# EAGLE board board (EAGLE 7.7.0)
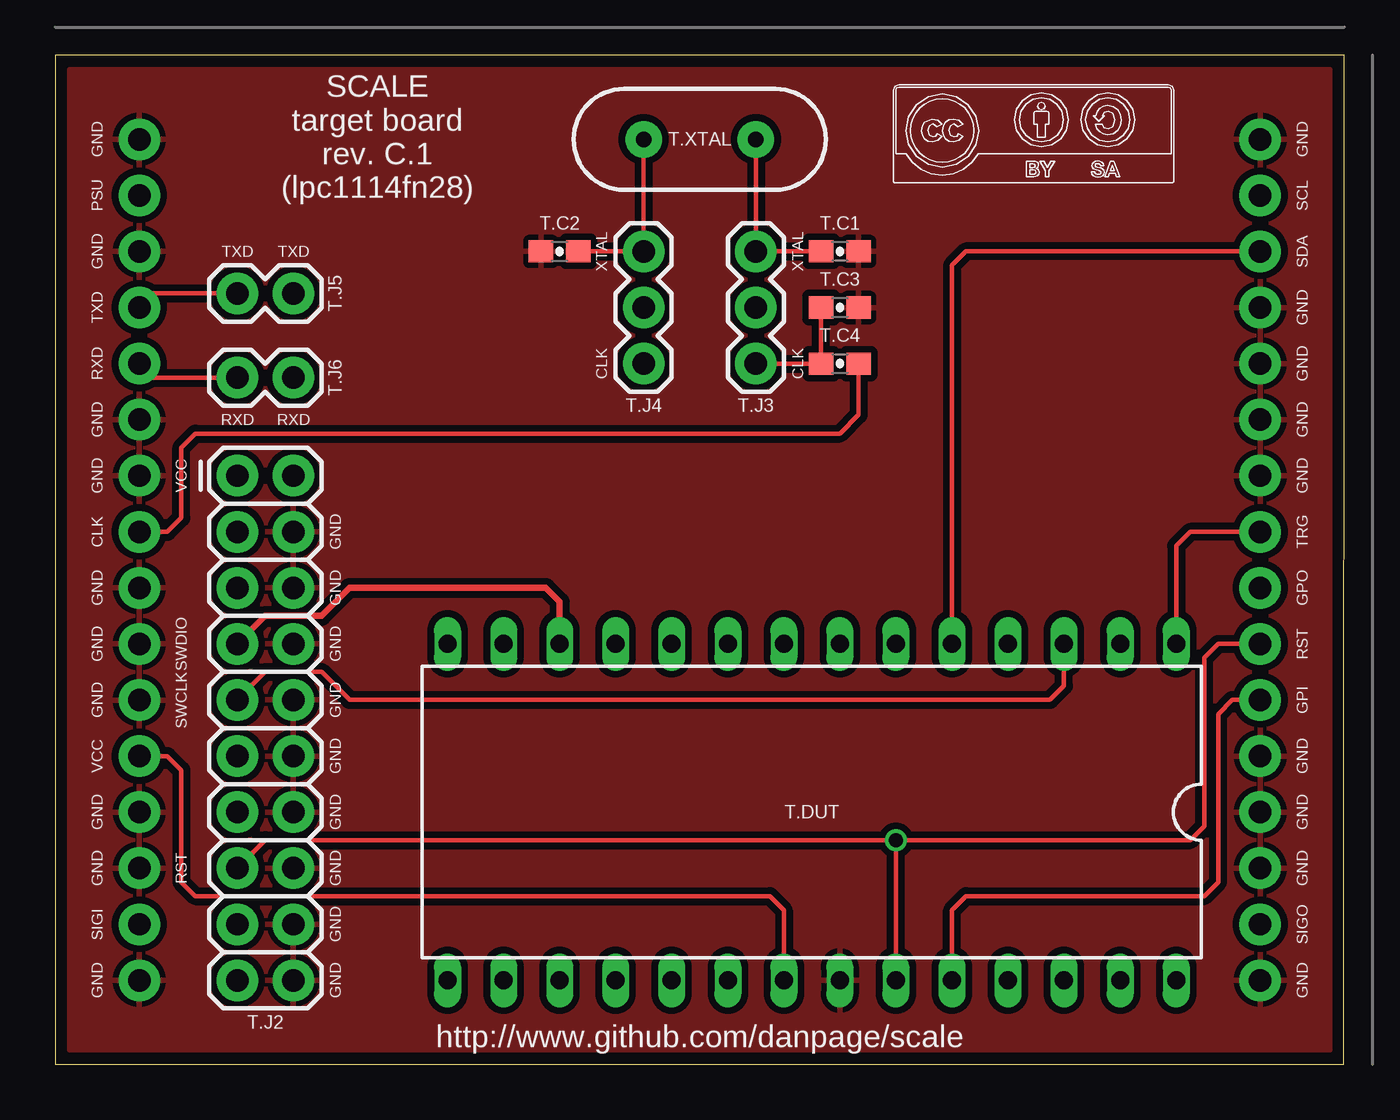
[diagram p0: board, top side]
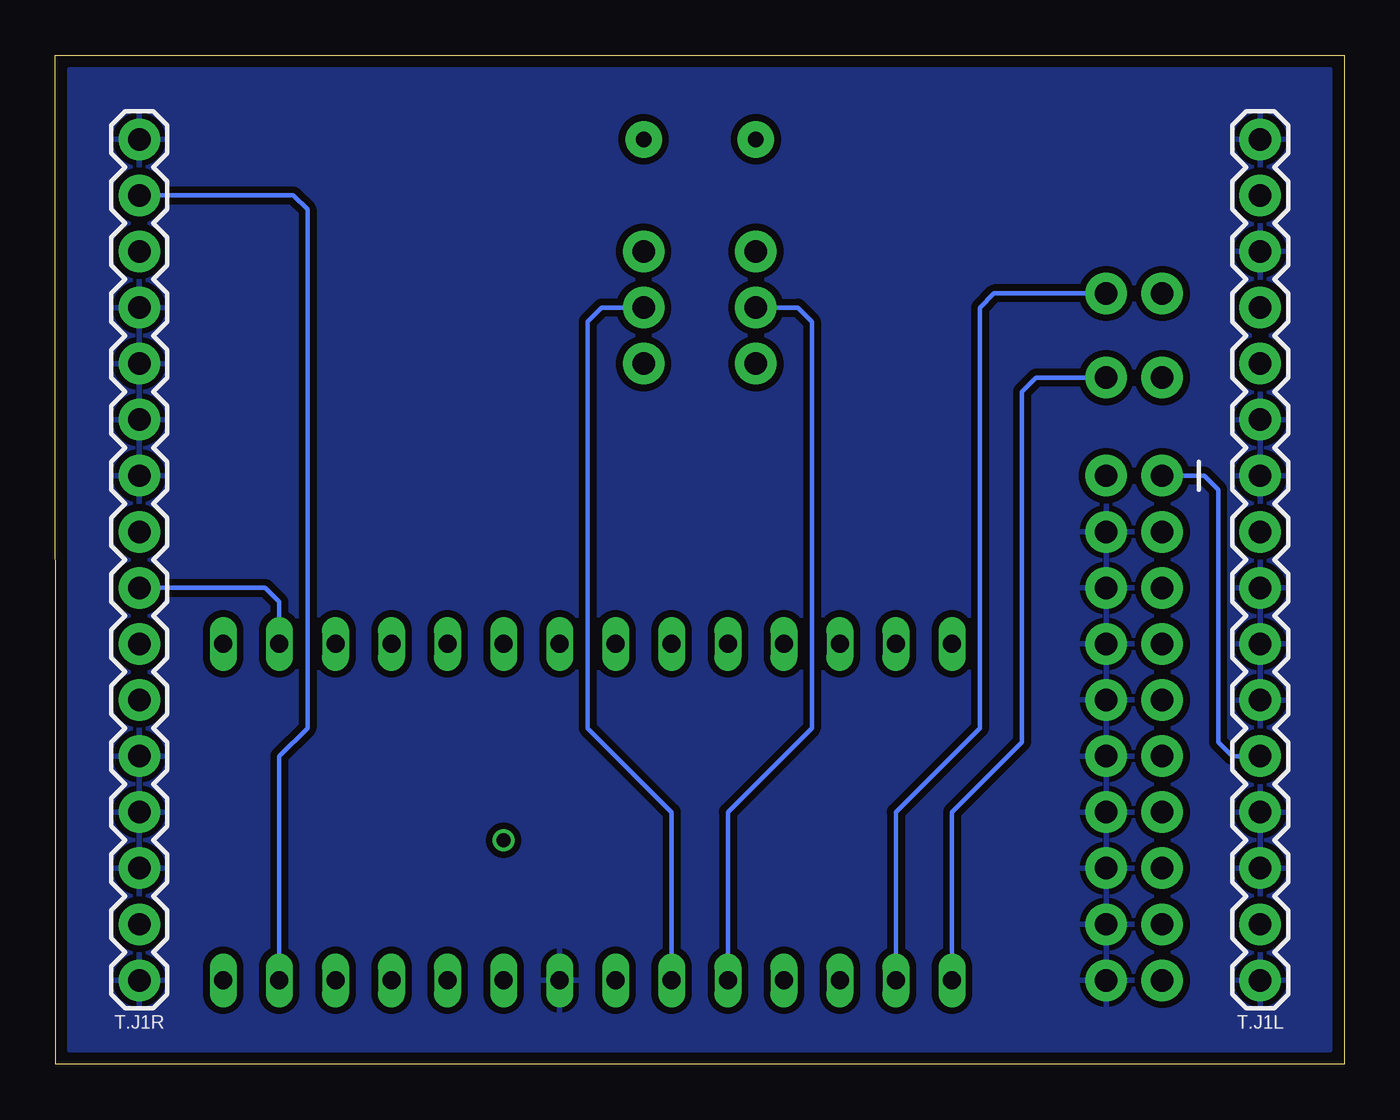
[diagram p1: board, bottom side, seen from below]

Size 58.42 x 45.72 mm. Coordinates in mm from the lower left corner, seen from the top.
Outline: 0,0 58.4,0 58.42,45.72 0,45.72 0,0
Copper layers (1*16): Top 0.0356mm / dielectric 1.5011mm / Bottom 0.0356mm
Design rules "oshpark-2layer": minimum track width 6mil, minimum drill 13mil, track to track 6mil, track to pad 6mil, pad to pad 6mil, via to via 6mil, smd to smd 6mil, copper to edge 15mil, drill to drill 6mil, minimum pad ring 7mil, minimum via ring 7mil, stop-mask expansion 2.5mil, vias tented up to drill 0mil, thermal gap 10mil

## Footprints (pad centres in the part's own frame; a part is rotated, then mirrored left to right if it is on the bottom)
0603-CAP = smd 1.1 x 1: 1 -0.85,0; 2 0.85,0
DIL28-6 = drill 0.813 long: 1 -16.51,-7.62; 2 -13.97,-7.62; 3 -11.43,-7.62; 4 -8.89,-7.62; 5 -6.35,-7.62; 6 -3.81,-7.62; 7 -1.27,-7.62; 8 1.27,-7.62; 9 3.81,-7.62; 10 6.35,-7.62; 11 8.89,-7.62; 12 11.43,-7.62; 13 13.97,-7.62; 14 16.51,-7.62; 15 16.51,7.62; 16 13.97,7.62; 17 11.43,7.62; 18 8.89,7.62; 19 6.35,7.62; 20 3.81,7.62; 21 1.27,7.62; 22 -1.27,7.62; 23 -3.81,7.62; 24 -6.35,7.62; 25 -8.89,7.62; 26 -11.43,7.62; 27 -13.97,7.62; 28 -16.51,7.62
1X16 = drill 1.016 pad 1.88: 1 0,0; 2 2.54,0; 3 5.08,0; 4 7.62,0; 5 10.16,0; 6 12.7,0; 7 15.24,0; 8 17.78,0; 9 20.32,0; 10 22.86,0; 11 25.4,0; 12 27.94,0; 13 30.48,0; 14 33.02,0; 15 35.56,0; 16 38.1,0
2X10 = drill 1.016 pad 1.88: 1 0,0; 2 0,2.54; 3 2.54,0; 4 2.54,2.54; 5 5.08,0; 6 5.08,2.54; 7 7.62,0; 8 7.62,2.54; 9 10.16,0; 10 10.16,2.54; 11 12.7,0; 12 12.7,2.54; 13 15.24,0; 14 15.24,2.54; 15 17.78,0; 16 17.78,2.54; 17 20.32,0; 18 20.32,2.54; 19 22.86,0; 20 22.86,2.54
1X03 = drill 1.016 pad 1.88: 1 0,0; 2 2.54,0; 3 5.08,0
1X02 = drill 1.016 pad 1.88: 1 0,0; 2 2.54,0
HC49US = drill 0.7 pad 1.651: 1 -2.54,0; 2 2.54,0

## Placement (x,y rotation side)
T.C1  0.018 nF = 18 pF  [0603-CAP]  35.56,36.83 180 top
T.C2  0.018 nF = 18 pF  [0603-CAP]  22.86,36.83 0 top
T.C3  0.3 nF = 300 pF  [0603-CAP]  35.56,34.29 180 top
T.C4  0.1 nF = 100 pF  [0603-CAP]  35.56,31.75 0 top
T.DUT  [DIL28-6]  34.29,11.43 180 top
T.J1L  [1X16]  3.81,3.81 90 bottom
T.J1R  [1X16]  54.61,3.81 90 bottom
T.J2  [2X10]  8.26,26.67 270 top
T.J3  [1X03]  31.75,36.83 270 top
T.J4  [1X03]  26.67,36.83 270 top
T.J5  [1X02]  8.26,34.92 0 top
T.J6  [1X02]  8.26,31.11 0 top
T.XTAL  16 Mhz  [HC49US]  29.21,41.91 0 top

## Library data of the parts
T.C1-T.C4 = SparkFun-Capacitors
T.DUT = ic-package
T.J1L T.J1R T.J2-T.J6 = SparkFun-Connectors
T.XTAL = SparkFun-FreqCtrl

## Nets
DUT_CLK: T.C4.2 T.J1L.9
DUT_GPI: T.DUT.24 T.J1R.6
DUT_GPO: T.DUT.2 T.J1R.8
DUT_RST: T.DUT.23 T.J1R.7 T.J2.15
DUT_RXD: T.J1L.12 T.J6.1
DUT_SCL: T.DUT.27 T.J1R.15
DUT_SDA: T.DUT.5 T.J1R.14
DUT_SIGI: T.J1L.2
DUT_SIGO: T.J1R.2
DUT_SWCLK: T.DUT.3 T.J2.9
DUT_SWDIO: T.DUT.12 T.J2.7
DUT_SWO: T.J2.13
DUT_TRG: T.DUT.1 T.J1R.9
DUT_TXD: T.J1L.13 T.J5.1
DUT_VCC: T.DUT.21 T.J1L.5 T.J2.1
DUT_XTAL1: T.DUT.20 T.J3.2
DUT_XTAL2: T.DUT.19 T.J4.2
GND: T.C1.1 T.C2.1 T.C3.1 T.DUT.22 T.J1L.1 T.J1L.3 T.J1L.4 T.J1L.6 T.J1L.7 T.J1L.8 T.J1L.10 T.J1L.11 T.J1L.14 T.J1L.16 T.J1R.1 T.J1R.3 T.J1R.4 T.J1R.5 T.J1R.10 T.J1R.11 T.J1R.12 T.J1R.13 T.J1R.16 T.J2.4 T.J2.6 T.J2.8 T.J2.10 T.J2.12 T.J2.14 T.J2.16 T.J2.18 T.J2.20
N$1: T.C1.2 T.J3.1 T.XTAL.2
N$2: T.C2.2 T.J4.1 T.XTAL.1
N$20: T.C3.2 T.C4.1 T.J3.3
N$27: T.DUT.16 T.J5.2
N$28: T.DUT.15 T.J6.2
PSU: T.J1L.15

## Tracks (layer width: path | path; a pad name or v marks a point on that pad's centre or on a via)
DUT_CLK
  Top 0.203: T.J1L.9 5.08,24.13 5.71,24.77 5.71,27.94 6.35,28.57 35.56,28.57 36.41,29.43 T.C4.2
DUT_GPI
  Top 0.203: T.DUT.24 40.64,6.99 41.27,7.62 52.07,7.62 52.7,8.26 52.7,15.88 53.34,16.51 T.J1R.6
DUT_GPO
  Bottom 0.203: T.J1R.8 48.9,21.59 48.26,20.95 T.DUT.2
DUT_RST  (via drill 0.64)
  Top 0.203: T.J2.15 9.53,10.16 v38.1,10.16 | T.DUT.23 v38.1,10.16 | v38.1,10.16 51.44,10.16 52.07,10.79 52.07,18.41 52.7,19.05 T.J1R.7
DUT_RXD
  Top 0.203: T.J1L.12 4.45,31.11 T.J6.1
DUT_SCL
  Bottom 0.203: T.J1R.15 47.62,39.37 46.99,38.73 46.99,15.24 48.26,13.97 T.DUT.27
DUT_SDA
  Top 0.203: T.J1R.14 41.27,36.83 40.64,36.2 T.DUT.5
DUT_SWCLK
  Top 0.203: T.J2.9 9.53,17.78 12.06,17.78 13.34,16.51 45.09,16.51 45.72,17.14 T.DUT.3
DUT_SWDIO
  Top 0.305: T.J2.7 9.53,20.32 12.06,20.32 13.34,21.59 22.23,21.59 22.86,20.95 T.DUT.12
DUT_TRG
  Top 0.203: T.J1R.9 51.44,24.13 50.8,23.5 T.DUT.1
DUT_TXD
  Top 0.203: T.J1L.13 4.45,34.92 T.J5.1
DUT_VCC
  Top 0.203: T.J1L.5 5.08,13.97 5.71,13.34 5.71,8.26 6.35,7.62 32.38,7.62 33.02,6.99 T.DUT.21
  Bottom 0.203: T.J1L.5 5.08,13.97 5.71,14.61 5.71,26.04 6.35,26.67 T.J2.1
DUT_XTAL1
  Bottom 0.203: T.J3.2 33.66,34.29 34.29,33.66 34.29,15.24 30.48,11.43 T.DUT.20
DUT_XTAL2
  Bottom 0.203: T.J4.2 24.77,34.29 24.13,33.66 24.13,15.24 27.94,11.43 T.DUT.19
GND
  pour Bottom (isolate 0.305): 0.64,0.64 0.64,45.09 57.78,45.09 57.78,0.64
  pour Top (isolate 0.305): 0.64,0.64 0.64,45.09 57.78,45.09 57.78,0.64
N$1
  Top 0.203: T.XTAL.2 T.J3.1 T.C1.2
N$2
  Top 0.203: T.XTAL.1 T.J4.1 T.C2.2
N$20
  Top 0.203: T.J3.3 T.C4.1 T.C3.2
N$27
  Bottom 0.203: T.J5.2 15.88,34.92 16.51,34.29 16.51,15.24 20.32,11.43 T.DUT.16
N$28
  Bottom 0.203: T.J6.2 13.97,31.11 14.61,30.48 14.61,14.61 17.78,11.43 T.DUT.15

## Text on the board
tPlace: GND | GND | SCALE / target board / rev. C.1 / (lpc1114fn28) | PSU | SCL | GND | TXD | TXD | XTAL | XTAL | SDA | TXD | GND | RXD | CLK | CLK | GND | GND | RXD | RXD | GND | GND | VCC | GND | CLK | GND | TRG | GND | GND | GPO | GND | SWDIO | GND | RST | GND | SWCLK | GND | GPI | VCC | GND | GND | GND | GND | GND | GND | RST | GND | GND | SIGI | GND | SIGO | GND | GND | GND | http://www.github.com/danpage/scale